# Altium PCB IOT.PcbDoc
Units mm, origin at the board's own origin, x right, y up, seen from the top; angles counter-clockwise.
Board outline 91.82 x 95.63 mm, 2 copper layers (Top Layer, Bottom Layer); 63 components, 48 nets, 238 pads, 49 vias.
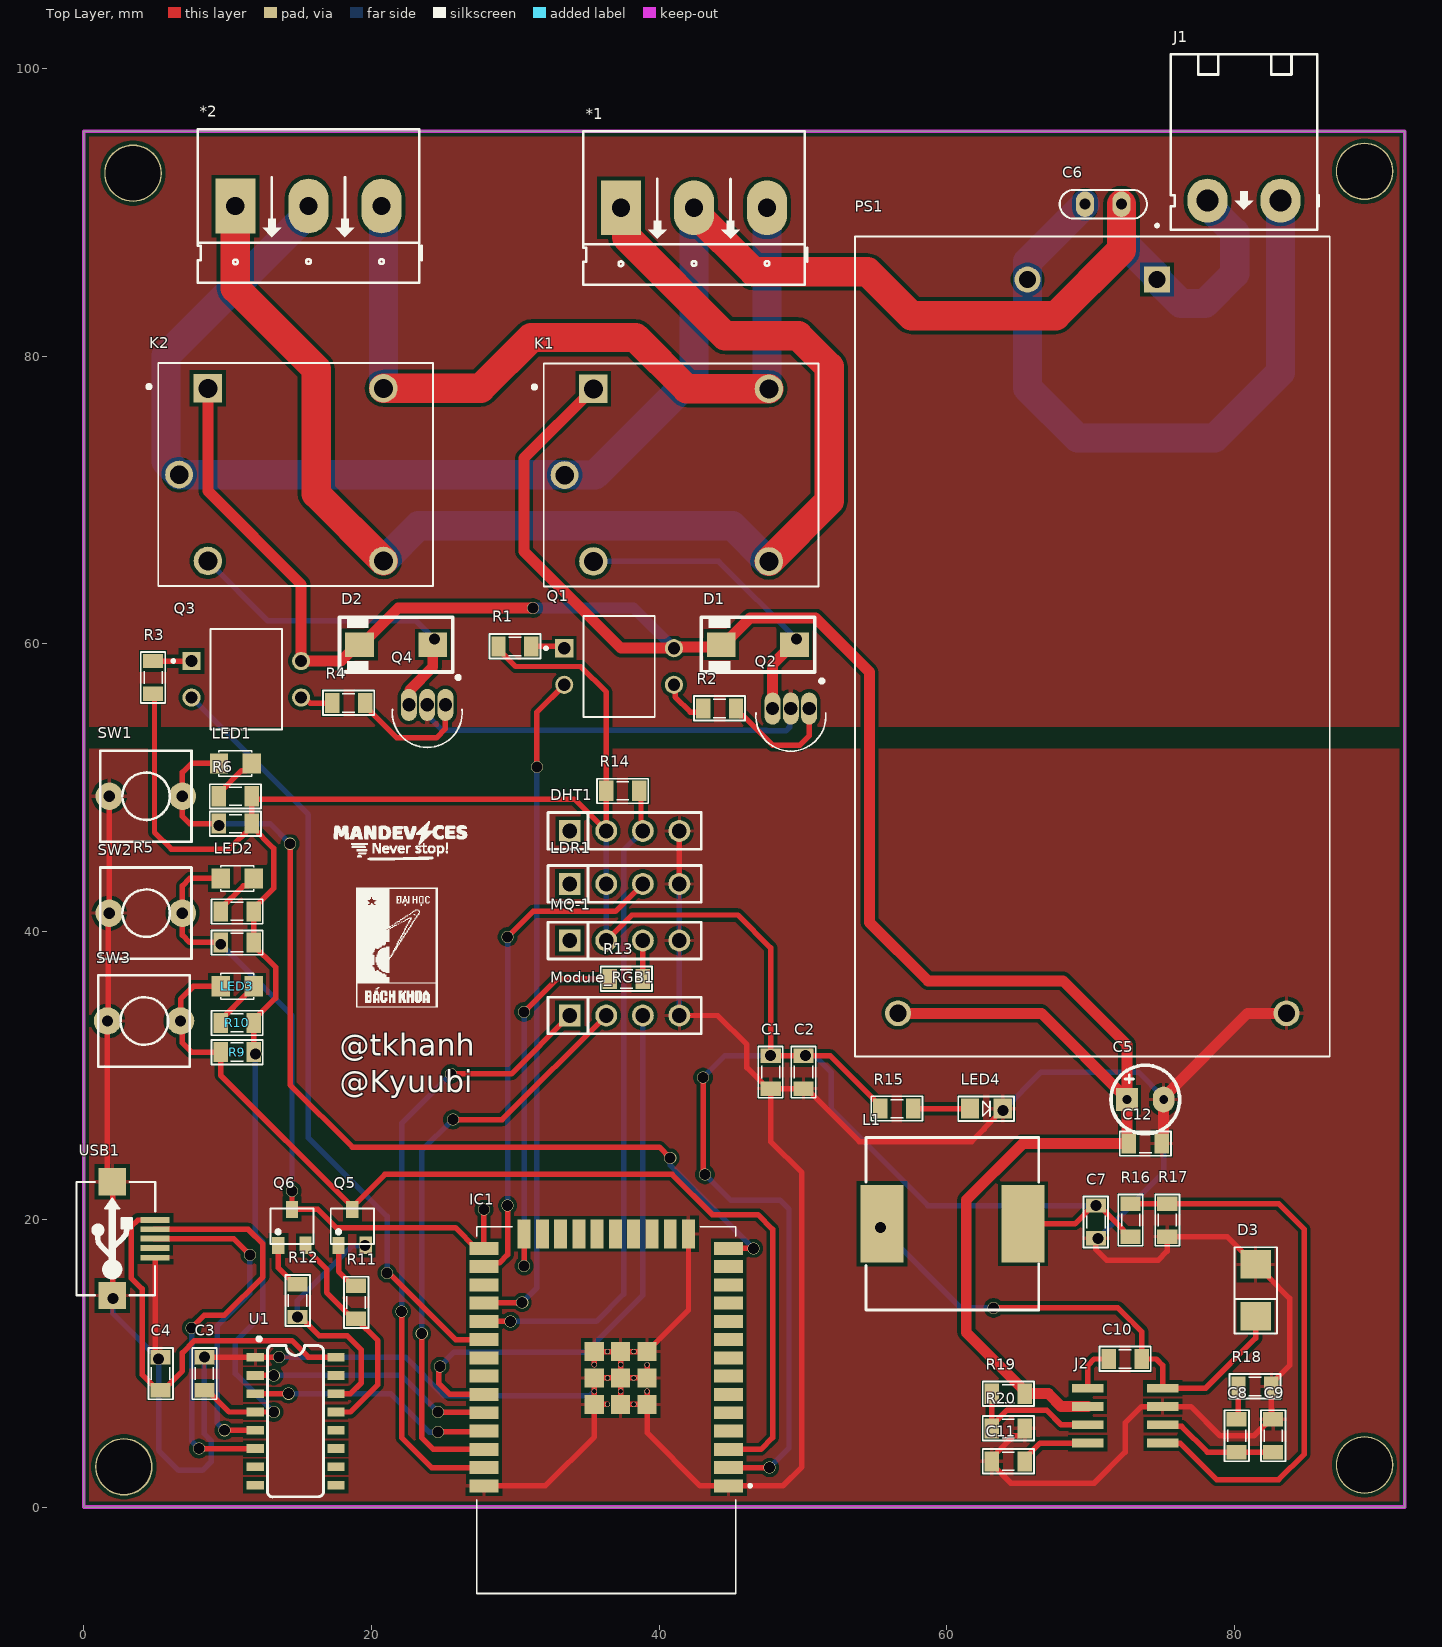
[diagram p0: Top Layer view]
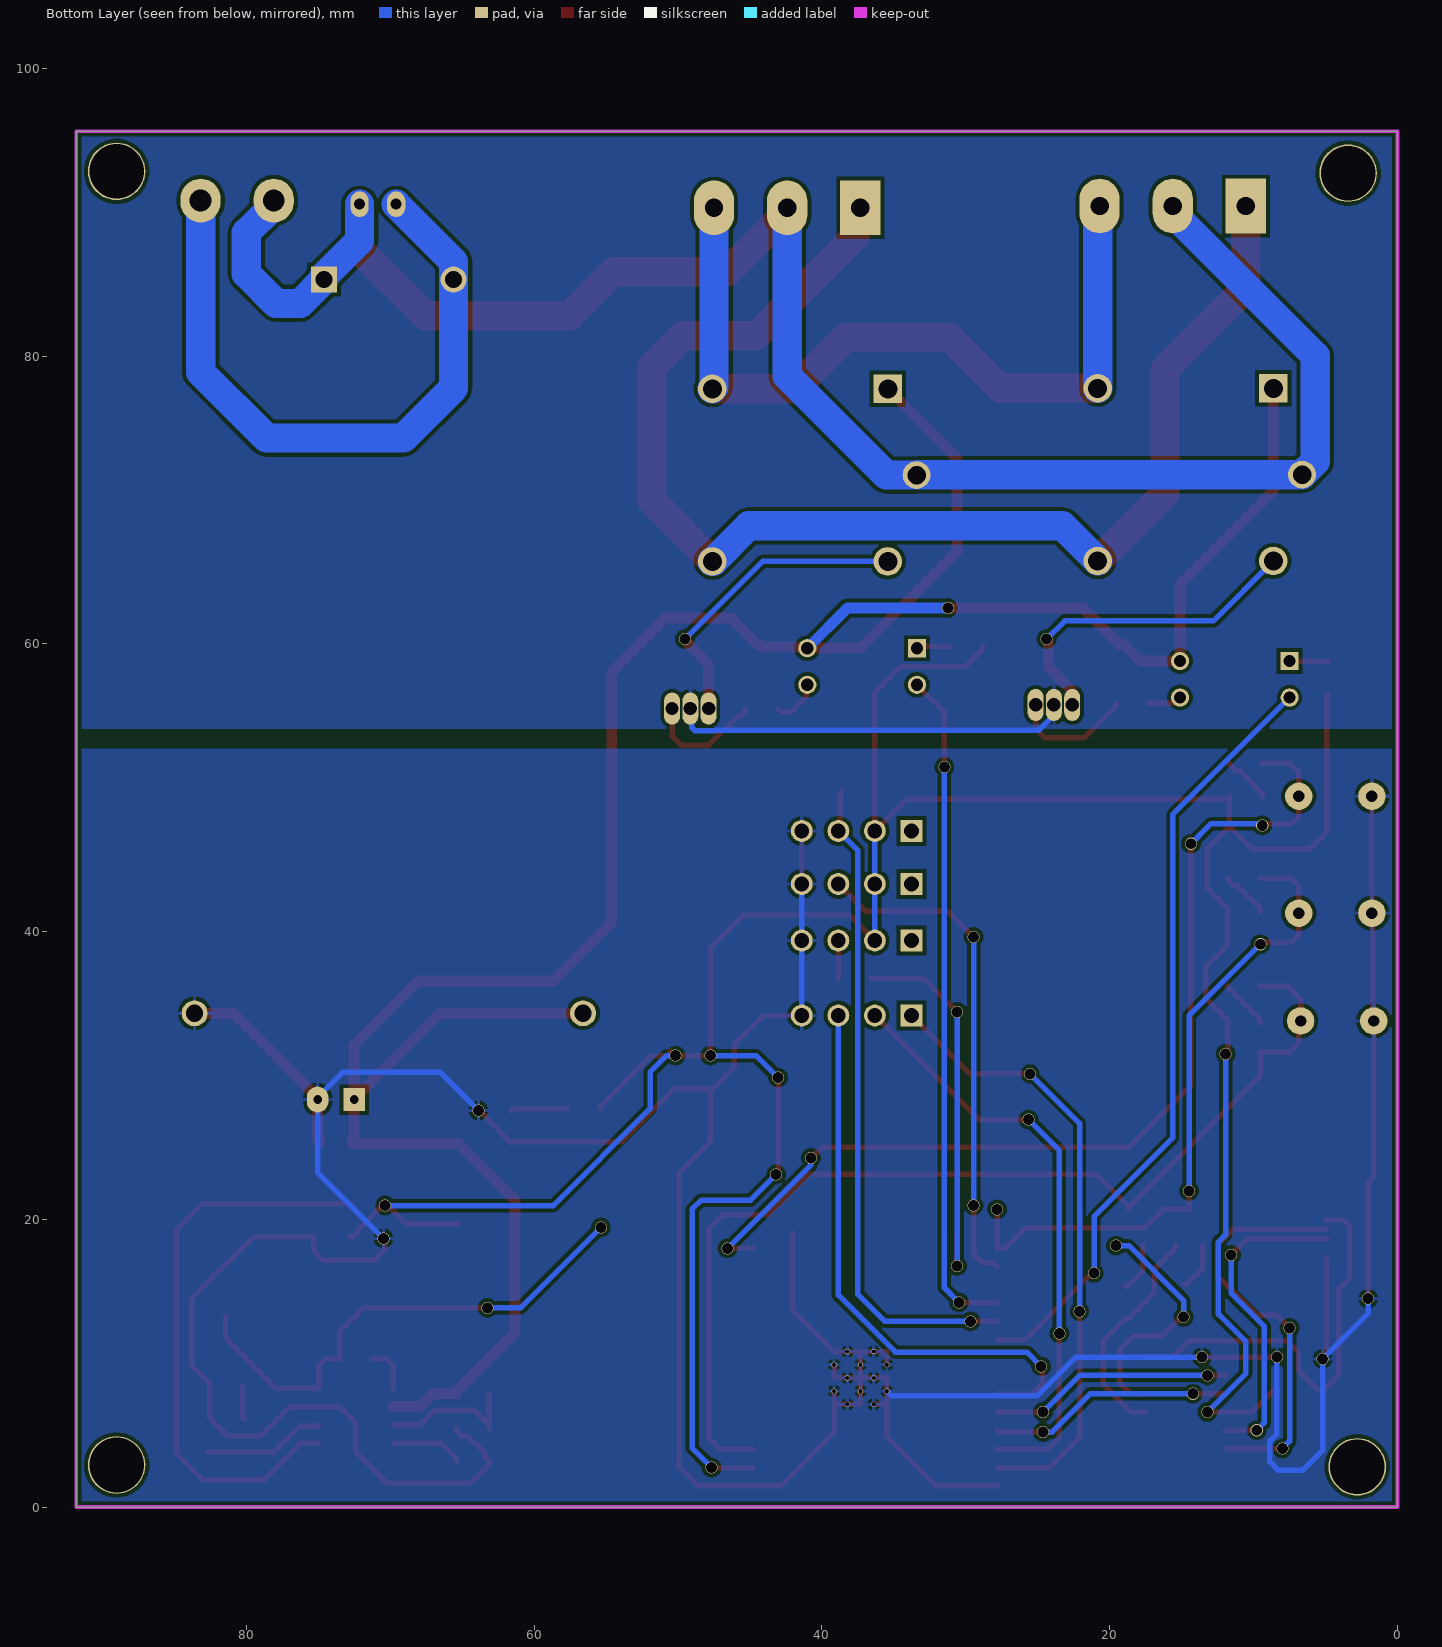
[diagram p1: Bottom Layer view, seen from below]

## Layer stack, top to bottom
Top Solder: solder mask 0.0102, Solder Resist, Dk 3.5
Top Layer: signal copper 0.0356
Dielectric 1: dielectric 0.32, FR-4, Dk 4.8
Bottom Layer: signal copper 0.0356
Bottom Solder: solder mask 0.0102, Solder Resist, Dk 3.5

## Board outline
0,0 0,95.631 91.821,95.631 91.821,0

## Design rules (kind name [scope] priority, off if disabled: settings)
Clearance [All] p1: gap=0.254 ignorepadtopadclearanceinfootprint=TRUE
DiffPairsRouting [All] p1: maxlimit=0.254 minlimit=0.254 mostfreqgap=0.254 toplayer_minwidth=0.381 toplayer_maxwidth=0.381 toplayer_prefwidth=0.381 bottomlayer_minwidth=0.381 bottomlayer_maxwidth=0.381 bottomlayer_prefwidth=0.381 maxuncoupledlength=12.7
PolygonConnect [All] p1: connectstyle=Relief reliefconductorwidth=0.254 reliefentries=4 polygonreliefangle="90 Angle" airgapwidth=0.254
RoutingVias [All] p1: holewidth=2.032 width=2.108 viastyle="Through Hole" minholewidth=0.381 minwidth=0.457 maxholewidth=0.762 maxwidth=0.838
SolderMaskExpansion [All] p1: expansion=0.102 istentingtop=FALSE
Width [All] p1: maxlimit=2.032 minlimit=0.381 preferedwidth=0.762 minimp=50.000000 maximp=50.000000 favimp=50.000000
29 further rules are at their usual default settings.

## Classes and differential pairs
differential pair class diff: D0
component class 4.SENSOR: DHT1 LDR1 Module_RGB1 MQ-1 R13 R14
component class 3.MCU: C1 C2 C3 C4 IC1 LED1 LED2 LED3 Q5 Q6 R5 R6 R10 R11 R12 SW1 SW2 SW3 U1 USB1
component class 2.RELAY: *1 *2 D1 D2 K1 K2 Q1 Q2 Q3 Q4 R1 R2 R3 R4
component class 1.POWER: C5 C6 C7 C8 C9 C10 C11 C12 D3 J1 J2 L1 LED4 PS1 R15 R16 R17 R18 R19 R20
differential pair D0: +D0_P -D0_N

## Components (designator, comment, footprint, x,y, rotation, side; value= is the part's Value field where it differs from the comment)
*1 "BIG_Header 3" KF-128_3P 37.338,90.297 r0 top
*2 "BIG_Header 3" KF-128_3P 10.541,90.424 r0 top
C1 "10uF" CAP_0805 47.752,30.226 r270 top value=33p
C2 "10uF" CAP_0805 50.038,30.226 r270 top value=33p
C3 "10nF" CAP_0805 8.382,9.271 r90 top value=33p
C4 "100nF" CAP_0805 5.334,9.271 r90 top value=33p
C5 "220uF" C3MM 73.787,28.321 r0 top
C6 "Varistor" CAP_CERAMIC 72.136,90.551 r180 top value=33p
C7 "22uF" CAP_0805 70.358,19.812 r270 top value=33p
C8 "680pF" CAP_0805 80.137,4.953 r90 top value=33p
C9 "47pF" CAP_0805 82.677,4.953 r90 top value=33p
C10 "0.1uF" CAP_0805 72.39,10.287 r180 top value=33p
C11 "15nF" CAP_0805 64.262,3.175 r180 top value=33p
C12 "10uF" CAP_0805 73.787,25.273 r0 top value=33p
D1 "1N5822" SMA 46.863,59.944 r180 top value="Diode c?m 1N5408"
D2 "1N5822" SMA 21.717,59.944 r180 top value="Diode c?m 1N5408"
D3 "1N4007" DIO-214AC(SMA) 81.407,14.986 r90 top
DHT1 "JP4" JP4-C1T 33.782,46.99 r0 top
IC1 "ESP32-WROOM-32" MODULE_ESP32-WROOM-32 36.322,6.731 r180 top
J1 "AC_In" KF2-5.08T 83.185,90.805 r180 top
J2 "TPS54232" SOIC8 72.39,6.35 r270 top
K1 "SRD-05VDC-SL-C" RELAY_SRD-05VDC-SL-C 41.525,71.724 r0 top
K2 "SRD-05VDC-SL-C" RELAY_SRD-05VDC-SL-C 14.732,71.755 r0 top
L1 "6.8uH" L-SMD-M-12x10 60.378,19.685 r90 top value="150 mH"
LDR1 "LDR" JP4-C1T 33.782,43.307 r0 top
LED1 "LED" LED-0805-Blue 11.684,51.689 r180 top value="LED 3 ly Single Colour"
LED2 "LED" LED-0805-Blue 11.811,43.688 r180 top value="LED 3 ly Single Colour"
LED3 "LED" LED-0805-Blue 11.811,36.195 r180 top value="LED 3 ly Single Colour"
LED4 "LED" LED_RED_SMD_0805 62.738,27.686 r0 top value="LED 3 ly Single Colour"
Module_RGB1 "JP4" JP4-C1T 33.782,34.163 r0 top
MQ-1 "JP4" JP4-C1T 33.782,39.37 r0 top
PS1 "HLK-20M12" CONV_HLK-20M12 70.104,59.817 r270 top
Q1 "PC817-B" DIP762W50P254L650H455Q4B 37.211,58.42 r0 top
Q2 "BC547" TO-92 49.022,54.991 r180 top value=C1815
Q3 "PC817-B" DIP762W50P254L650H455Q4B 11.303,57.531 r0 top
Q4 "BC547" TO-92 23.749,55.245 r180 top value=C1815
Q5 "C1815" SOT23D 18.669,19.431 r0 top
Q6 "C1815" SOT23D 14.478,19.431 r0 top
R1 "1K" RES-SMD-0805 29.972,59.817 r180 top
R2 "1K" RES-SMD-0805 44.196,55.499 r180 top
R3 "1K" RES-SMD-0805 4.826,57.658 r270 top
R4 "1K" RES-SMD-0805 18.415,55.88 r180 top
R5 "10k" RES-SMD-0805 10.541,47.498 r0 top
R6 "330" RES-SMD-0805 10.541,49.403 r0 top
R7 "10k" RES-SMD-0805 10.668,39.243 r0 top
R8 "330" RES-SMD-0805 10.668,41.402 r0 top
R9 "10k" RES-SMD-0805 10.668,31.623 r0 top
R10 "330" RES-SMD-0805 10.668,33.655 r0 top
R11 "10k" RES-SMD-0805 18.923,14.224 r90 top
R12 "10k" RES-SMD-0805 14.859,14.351 r90 top
R13 "1k" RES-SMD-0805 37.719,36.703 r180 top
R14 "10k" RES-SMD-0805 37.465,49.784 r0 top
R15 "330" RES-SMD-0805 56.515,27.686 r180 top
R16 "4.7K" RES-SMD-0805 72.771,19.939 r270 top
R17 "1.5K" RES-SMD-0805 75.311,19.939 r90 top
R18 "17.4K" RES-SMD-0805 81.407,8.382 r180 top
R19 "150K" RES-SMD-0805 64.262,7.874 r0 top
R20 "48.7K" RES-SMD-0805 64.262,5.461 r180 top
SW1 "SW" SW2 6.858,49.403 r180 top value="SW chip 2 pin"
SW2 "SW" SW2 6.858,41.275 r180 top value="SW chip 2 pin"
SW3 "SW" SW2 6.731,33.782 r180 top value="SW chip 2 pin"
U1 "CH340C" SOP-16 14.732,5.969 r270 top
USB1 "USB" USB-M1 4.953,18.654 r90 top

## Footprints (in the part's own frame and the unit in brackets; to place one, negate y for a bottom-side part, rotate by r counter-clockwise, add the part's x,y. Pads: shape width x height; smd on the part's side, far side on the other; paste and mask are expansions set on the pad)
C3MM [mm]
  rect 1.5x1.58 hole 0.6: 1(-1.27,0)
  oval 1.5x1.8 hole 0.6: 2(1.27,0)
  silkscreen extent -2.39,-2.39 2.39,2.39, body extent -1.99,-2.03 2.01,1.97, height 7.01
CAP_0805 [mil]
  rect 39.37x55 smd: 1(-45,0) 2(45,0)
  silkscreen extent -70,-34 70,33, body extent -40,-25 40,25, height 24
CAP_CERAMIC [mil] "Tu gom mini"
  oval 50x70 hole 30: 1(0,0) 2(100,0)
  silkscreen extent -69,-39 169,39, body extent -65,-33 165,33, height 241
CONV_HLK-20M12 [mm]
  rect 1.8x1.8 hole 1.2: 1(-25.5,4.5)
  round 1.8 hole 1.2: 2(-25.5,-4.5) 3(25.5,13.5) 4(25.5,-13.5)
  silkscreen extent -29.35,-16.5 28.5,16.5, body extent -28.5,-16.5 28.5,16.5, height 22.5
DIO-214AC(SMA) [mm] "DO-214AC Diode Smallest Size"
  rect 2x2.1 smd: 1(1.88,-0.051) 2(-1.732,-0.051)
  silkscreen extent -2.92,-1.52 3.07,1.42, body extent -2.5,-1.35 2.7,1.25, height 2.4
DIP762W50P254L650H455Q4B [mm]
  rect 1.26x1.26 hole 0.84: 1(-3.81,1.27)
  round 1.26 hole 0.84: 2(-3.81,-1.27) 3(3.81,-1.27) 4(3.81,1.27)
  silkscreen extent -5.18,-3.5 2.48,3.5
JP4-C1T [mm] "4 row, straight, gold plating"
  rect 1.52x1.52 hole 1.02: 1(0,0)
  round 1.52 hole 1.02: 2(2.54,0) 3(5.08,0) 4(7.62,0)
  silkscreen extent -1.52,-1.27 9.14,1.27, body extent -1.52,-1.25 9.14,1.25, height 8.51
KF2-5.08T [mil] "Header 2, 2 pin, hight 300mil, Pin to Pin 200, Colour Green"
  oval 110x120 hole 60: 1(0,0) 2(200,0)
  silkscreen extent -105,-400 300,80, body extent -97,-399 297,73, height 334
KF-128_3P [mm]
  rect 2.794x3.8 hole 1.27: 1(0,0)
  oval 2.794x3.8 hole 1.27: 2(5.08,0) 3(10.16,0)
  silkscreen extent -2.62,-5.33 12.95,5.33, body extent -2.56,-5.25 13.28,5.28, height 14.3
L-SMD-M-12x10 [mm] "WE-PDA SMD Shielded Power Inductor, 1210"
  rect 5.4x3 smd: 1(0,4.9) 2(0,-4.9)
  silkscreen extent -6,-6 6,6, body extent -6,-6 6,6, height 9.7
LED-0805-Blue [mil]
  rect 50x55 smd: 1(0,0) 2(90,0)
  silkscreen extent 0,-35 90,35, body extent 5,-25 85,25, height 43
LED_RED_SMD_0805 [mil]
  rect 50x55 smd: 1(-45,0) 2(45,0)
  silkscreen extent -77,-34 76,33, body extent -41,-27 41,27, height 35
MODULE_ESP32-WROOM-32 [mm]
  rect 2x0.9 smd: 1(-8.5,5.26) 2(-8.5,3.99) 3(-8.5,2.72) 4(-8.5,1.45) 5(-8.5,0.18) 6(-8.5,-1.09) 7(-8.5,-2.36) 8(-8.5,-3.63) 9(-8.5,-4.9) 10(-8.5,-6.17) 11(-8.5,-7.44) 12(-8.5,-8.71) 13(-8.5,-9.98) 14(-8.5,-11.25) 25(8.5,-11.25) 26(8.5,-9.98) 27(8.5,-8.71) 28(8.5,-7.44) 29(8.5,-6.17) 30(8.5,-4.9) 31(8.5,-3.63) 32(8.5,-2.36) 33(8.5,-1.09) 34(8.5,0.18) 35(8.5,1.45) 36(8.5,2.72) 37(8.5,3.99) 38(8.5,5.26)
  rect 0.9x2 smd: 15(-5.715,-12.25) 16(-4.445,-12.25) 17(-3.175,-12.25) 18(-1.905,-12.25) 19(-0.635,-12.25) 20(0.635,-12.25) 21(1.905,-12.25) 22(3.175,-12.25) 23(4.445,-12.25) 24(5.715,-12.25)
  rect 1.33x1.33 smd: 39_1(-2.835,-0.405) 39_2(-1,-0.405) 39_3(0.835,-0.405) 39_4(-2.835,-2.24) 39_5(-1,-2.24) 39_6(0.835,-2.24) 39_7(-2.835,-4.075) 39_8(-1,-4.075) 39_9(0.835,-4.075)
  round 0.35 hole 0.3: 39_10(-1.917,-0.405) 39_11(-0.082,-0.405) 39_12(-2.835,-1.322) 39_13(-1,-1.322) 39_14(0.835,-1.322) 39_15(-1.917,-2.24) 39_16(-0.082,-2.24) 39_17(-2.835,-3.157) 39_18(-1,-3.157) 39_19(0.835,-3.157) 39_20(-1.917,-4.075) 39_21(-0.082,-4.075)
  silkscreen extent -10.1,-12.75 9,12.75, body extent -9.02,-12.75 8.98,12.75, height 3.2
RELAY_SRD-05VDC-SL-C [mm]
  rect 1.98x1.98 / inner round 1.98 / far side rect 1.98x1.98 hole 1.32: A1(-6.1,6)
  round 1.98 hole 1.32: A2(-6.1,-6) NC(6.1,6) NO(6.1,-6)
  round 1.935 hole 1.29: COM(-8.1,0)
  silkscreen extent -10.3,-7.75 9.55,7.75, body extent -9.6,-7.8 9.6,7.8, height 15.8
RES-SMD-0805 [mil]
  rect 39.37x55 smd: 1(-45,0) 2(45,0)
  silkscreen extent -70,-34 70,33, body extent -39,-25 39,25, height 31
SMA [mm]
  rect 2x1.7 smd: 1(-2.544,0) 2(2.544,0)
  silkscreen extent -3.94,-1.9 3.94,1.91, body extent -2.87,-1.4 2.87,1.4, height 2.29
SOIC8 [mm]
  rect 0.6x2.2 smd: 1(-1.905,-2.6) 2(-0.635,-2.6) 3(0.635,-2.6) 4(1.905,-2.6) 5(1.905,2.6) 6(0.635,2.6) 7(-0.635,2.6) 8(-1.905,2.6)
SOP-16 [mm]
  rect 0.6x1.2 smd: 1(-4.445,-2.8) 2(-3.175,-2.8) 3(-1.905,-2.8) 4(-0.635,-2.8) 5(0.635,-2.8) 6(1.905,-2.8) 7(3.175,-2.8) 8(4.445,-2.8) 9(4.445,2.8) 10(3.175,2.8) 11(1.905,2.8) 12(0.635,2.8) 13(-0.635,2.8) 14(-1.905,2.8) 15(-3.175,2.8) 16(-4.445,2.8)
  silkscreen extent -5.84,-2.67 5.26,1.95, body extent -4.95,-3.47 4.95,3.47, height 1.75
SOT23D [mm] "SOT 23C - 1-3-2 - BCE"
  rect 0.85x1.2 smd: 1(-0.95,-1.25) 2(0.94,-1.245) 3(0,1.25)
  silkscreen extent -1.5,-1.14 1.5,1.32, body extent -1.5,-1.17 1.5,1.33, height 1.06
SW2 [mil] "SW button 2pin, 250x 250 mil"
  round 75 hole 31: 1(0,0) 2(200,0)
  silkscreen extent -25,-125 225,125
TO-92 [mm]
  oval 1.11x2.22 hole 0.93: 1(-1.397,-0.506) 2(-0.127,-0.506) 3(1.143,-0.506)
  silkscreen extent -2.56,-2.54 2.3,2.45, body extent -2.41,-0.89 2.16,2.73, height 20.45
USB-M1 [mm]
  rect 0.4x2 smd: 1(1.3,0) 2(0.65,0) 3(0,0) 4(-0.65,0) 5(-1.321,0)
  rect 1.9x1.9 smd: 5(-3.95,2.968) 5(3.95,2.968)
  silkscreen extent -3.94,-0.03 3.94,5.46, body extent -3.98,0.11 4,5.54, height 2.71

## Part data
C1 C2 C3 C4 C7 C8 C9 C10 C11 C12: library part CapSMD, "Capacitor", LatestRevisionDate=17-Jul-2002, LatestRevisionNote="Re-released for DXP Platform.", PackageReference=RAD-0.3, Published=8-Jun-2000, Publisher="Altium Limited"
C5: library part "Cap Pol", "Polarized Capacitor (Axial)", LatestRevisionDate=17-Jul-2002, LatestRevisionNote="Re-released for DXP Platform.", PackageReference=POLAR0.8, Published=8-Jun-2000, Publisher="Altium Limited"
C6: library part CapCeramic, "Capacitor", LatestRevisionDate=17-Jul-2002, LatestRevisionNote="Re-released for DXP Platform.", PackageReference=RAD-0.3, Published=8-Jun-2000, Publisher="Altium Limited"
D1 D2: "Schottky Rectifiers"
D3: library part D1A, "Diode 1A"
DHT1 Module_RGB1 MQ-1: "WR-PHD 2.54 mm Angled Socket Header", Manufacturer="W¨¹rth Elektronik eiSos GmbH", partNo=613004143121, ComponentLink1 Description=Manufacturer, ComponentLink1URL=http://www.we-online.com, ComponentLink2 Description=Datasheet, ComponentLink2URL=http://katalog.we-online.de/em/datasheet/6130xx143121.pdf, Created by="Karrer Zheng", Created Date="29 March 2013", NoPins=04
IC1: "Bluetooth, WiFi Transceiver Module 2.4GHz ~ 2.5GHz Surface Mount", Package="Module Espressif Systems", Digi-Key_Part_Number=1904-1010-1-ND, Digi-Key_Purchase_URL=https://www.digikey.com/product-detail/en/espressif-systems/ESP32-WROOM-32/1904-1010-1-ND/8544305?utm_source=snapeda&utm_medium=aggregator&utm_campaign=symbol, MF="Espressif Systems", MP=ESP32-WROOM-32, SnapEDA_Link=https://www.snapeda.com/parts/ESP32-WROOM-32/Espressif%20Systems/view-part/2753322/?ref=snap
J1: library part KF2, Manufacturer="Würth Elektronik eiSos GmbH", partNo=691103110002, ComponentLink1 Description=Manufacturer, ComponentLink1URL=http://www.we-online.com, ComponentLink2 Description=Datasheet, ComponentLink2URL=http://katalog.we-online.de/em/datasheet/6911031100xx.pdf, Created by="Karrer Zheng", Created Date="29 October 2013", NoPins=2
J2: "Buck Switching Regulator IC Positive Adjustable 0.8V 1 Output 2A 8-SOIC (0.154, 3.90mm Width)", Package="- Texas Instruments", Check_prices=https://www.snapeda.com/parts/TPS54232/Texas+Instruments/view-part/?ref=eda, MF="Texas Instruments", MP=TPS54232, SnapEDA_Link=https://www.snapeda.com/parts/TPS54232/Texas+Instruments/view-part/?ref=snap
K1 K2: "https://linhkien.cxt.vn/3210-sra-12vdc-cl-songle-relay-20a-12vdc-5-chan.html", Package="NON STANDARD-5 Songle Relay", Availability="Not in stock", Check_prices=https://www.snapeda.com/parts/SRD-05VDC-SL-C/Songle+Relay/view-part/?ref=eda, MF="Songle Relay", MP=SRD-05VDC-SL-C, Price=None, SnapEDA_Link=https://www.snapeda.com/parts/SRD-05VDC-SL-C/Songle+Relay/view-part/?ref=snap
L1: library part Inductor, "Inductor"
LDR1: library part JP4, "WR-PHD 2.54 mm Angled Socket Header", Manufacturer="W¨¹rth Elektronik eiSos GmbH", partNo=613004143121, ComponentLink1 Description=Manufacturer, ComponentLink1URL=http://www.we-online.com, ComponentLink2 Description=Datasheet, ComponentLink2URL=http://katalog.we-online.de/em/datasheet/6130xx143121.pdf, Created by="Karrer Zheng", Created Date="29 March 2013", NoPins=04
LED1 LED2 LED3 LED4: "LED Single colour Green and Red"
PS1: "20W ultra-small series module power supply", Package="Non-Standard Hi-link", Availability="Not in stock", Check_prices=https://www.snapeda.com/parts/HLK-20M12/Hi-link/view-part/?ref=eda, MF=Hi-link, MP=HLK-20M12, Price=None, SnapEDA_Link=https://www.snapeda.com/parts/HLK-20M12/Hi-link/view-part/?ref=snap
Q1 Q3: "Phototransistors 4-DIP _0.300, 7.62mm_", Package="DIP-4 American Bright", Availability=Unavailable, MF="American Bright", MP=PC817-B, Price=None, SnapEDA_Link=https://www.snapeda.com/parts/PC817-B/American%20Bright/view-part/524587/?ref=snap
Q2 Q4: library part C1815, "NPN 600mW, ECB"
Q5 Q6: library part 2SC1815, "NPN 600mW, ECB"
R1 R2 R3 R4 R6 R8 R10 R15 R16 R17 R18 R19 R20: library part "Resistor - SMD", "Resistor SMD", Manufacturer="Generic Components", Class=Passive, Published=08/06/2000, Publisher="Altium Hobart Technology Centre"
R5 R7 R9 R11 R12: library part "Resistor - SMD", "Resistor", Manufacturer="Generic Components", Class=Passive, Published=08/06/2000, Publisher="Altium Hobart Technology Centre"
R13: library part "Resistor - SMD", Manufacturer="Generic Components", Class=Passive, Published=08/06/2000, Publisher="Altium Hobart Technology Centre"
R14: library part "Resistor - SMD", "1k", Manufacturer="Generic Components", Class=Passive, Published=08/06/2000, Publisher="Altium Hobart Technology Centre"
SW1 SW2 SW3: library part SW2, "Switch button 2 pin"
U1: "USB to serial chip CH340", Package=Package, Availability=Unavailable, Check_prices=https://www.snapeda.com/parts/CH340C/WCH/view-part/5428851/?ref=eda, MF=WCH, MP=CH340C, Price=None, SnapEDA_Link=https://www.snapeda.com/parts/CH340C/WCH/view-part/5428851/?ref=snap
USB1: library part USB-M

## Free pads (board coordinates)
  round 4 hole 3.8: 2(2.794,2.794) 2(3.429,92.71) 2(89.027,2.921) 2(89.027,92.837)

## Via types
v1: diameter 0.838, hole 0.762, Top Layer to Bottom Layer, 49 vias

## Nets (pads, with @x,y where several pads share a name; then routed paths per layer and width w, separated by ;. In a path a pad name is that pad's centre, name@x,y a point inside that pad or via, vN(x,y) a via of type N, cw(c..) or ccw(c..) an arc to the next point about the centre after c; other vN are vias at no path point)
3V3: C1.1 C2.1 C3.1 C7.1 DHT1.2 IC1.2 L1.2 LDR1.2 MQ-1.2 R1.2 R3.2 R5.2 R6.2 R7.2 R8.2 R9.2 R10.2 R14.1 R15.2 R16.2 U1.4 | length 227.5
  Top Layer w0.381: R3.2 4.92,56.421 4.92,46.896 6.096,45.72 10.104,45.72 R5.2@11.684,47.3 ; C3.1 8.58,8.128 10.104,6.604 U1.4 v1(13.208,6.604) ; R6.2 R6.2@11.684,49.205 ; R9.2 R10.2 11.811,33.853 13.335,35.378 13.335,37.52 11.811,39.045 R7.2 R8.2 11.811,41.6 13.208,42.998 13.208,45.775 R5.2@11.684,47.3 ; R1.2 28.829,59.619 30.028,58.42 34.544,58.42 36.322,56.642 R14.1 DHT1.2 34.107,49.205 R6.2@11.684,49.205 ; MQ-1.2 38.1,41.148 45.466,41.148 47.752,38.862 v1(47.752,31.369) v1(50.165,31.369) C2.1@50.236,31.369 ; v1@43.053,23.241 v1(43.053,29.845) ; IC1.2 v1(47.678,2.741) ; C2.1@50.546,31.679 C2.1@50.236,31.369 ; R15.2 55.372,27.884 51.887,31.369 C2.1@50.236,31.369 ; L1.2 68.889,19.685 70.16,20.955 v1(70.358,20.955) 70.556,20.955 72.263,19.249 72.263,19.106 72.573,18.796 R16.2 ; R5.2@11.684,47.3 R5.2 R6.2@11.684,49.205
  Bottom Layer w0.381: v1(11.938,31.496) 11.938,18.923 12.446,18.415 12.446,13.399 10.541,11.494 10.541,9.271 v1(13.208,6.604) ; MQ-1.2 LDR1.2 DHT1.2 ; v1(43.053,29.845) 44.577,31.369 v1(47.752,31.369) ; v1(43.18,23.114) 44.958,21.336 48.387,21.336 49.022,20.701 49.022,4.085 v1(47.678,2.741) ; v1(50.165,31.369) 50.8,31.369 51.943,30.226 51.943,27.686 58.674,20.955 v1(70.358,20.955)
5V: C4.1 U1.16 USB1.1 | length 29
  Top Layer w0.381: USB1.1 4.948,19.948 3.769,19.948 3.302,19.482 3.302,15.916 4.064,15.154 4.064,9.199 5.136,8.128 C4.1 5.532,8.128 6.858,9.453 6.858,10.717 7.698,11.557 14.478,11.557 15.621,10.414 U1.16
12V: C5.1 C12.1 D1.2 D2.2 J2.2 K1.A1 K2.A1 PS1.4 Q1.4 Q3.4 R19.2 | length 189.7
  Top Layer w0.762: K2.A1 8.632,70.616 15.113,64.135 Q3.4 17.88,58.801 19.023,59.944 D2.2 19.323,59.944 21.863,62.484 v1(31.242,62.484) ; K1.A1 30.607,72.906 30.607,66.421 37.338,59.69 Q1.4 41.116,59.785 44.16,59.785 D1.2 44.469,59.944 46.312,61.787 50.862,61.787 54.61,58.039 54.61,40.64 58.674,36.576 68.072,36.576 72.517,32.131 C5.1@72.517,28.361 ; PS1.4 66.561,34.317 C5.1@72.517,28.361 ; J2.2 67.937,6.985 67.048,7.874 R19.2 65.405,8.072 61.341,12.136 61.341,21.336 65.278,25.273 C12.1 72.644,25.471 72.517,25.598 C5.1 C5.1@72.517,28.361
  Bottom Layer w0.762: v1(31.242,62.484) 38.227,62.484 Q1.4
AC2: C6.2 J1.1 PS1.2 | length 47.3
  Bottom Layer w2.032: C6.2 65.604,86.559 PS1.2 65.604,77.779 69.088,74.295 78.613,74.295 83.185,78.867 J1.1
COM1: *1.2 *2.2 C6.1 J1.2 K1.COM K2.COM PS1.1 | length 130.6
  Top Layer w2.032: *1.2 42.418,90 46.566,85.852 54.483,85.852 57.531,82.804 67.564,82.804 72.136,87.376 C6.1
  Bottom Layer w2.032: *2.2 15.621,89.921 5.715,80.015 5.715,72.672 K2.COM 33.394,71.755 K1.COM 35.529,71.724 42.418,78.613 *1.2 ; C6.1 72.136,88.011 74.604,85.543 PS1.1 76.261,83.66 77.945,83.66 80.01,85.725 80.01,88.567 78.105,90.472 J1.2
D0_N: U1.5 USB1.3 | length 22.6
  Top Layer w0.381: USB1.3 9.062,18.654 9.064,18.656 10.427,18.656 v1(11.557,17.526) ; v1(9.779,5.334) U1.5
  Bottom Layer w0.381: v1(9.779,5.334) 9.271,5.842 9.271,12.573 11.557,14.859 v1(11.557,17.526)
D0_P: U1.6 USB1.2 | length 29.2
  Top Layer w0.381: USB1.2 9.062,19.304 9.064,19.306 11.431,19.306 12.446,18.291 12.446,16.002 9.779,13.335 8.382,13.335 v1(7.493,12.446) ; v1(8.001,4.064) U1.6
  Bottom Layer w0.381: v1(7.493,12.446) 7.493,4.572 v1(8.001,4.064)
DTR: Q6.2 R11.1 U1.13 | length 15.6
  Top Layer w0.381: Q6.2 15.418,18.011 16.891,16.538 16.891,14.915 18.725,13.081 R11.1 20.447,11.557 20.447,8.509 18.542,6.604 U1.13
EN: IC1.3 LED3.2 Q5.3 R9.1 SW3.1 | length 73.5
  Top Layer w0.381: LED3.2 7.62,36.195 6.731,35.306 SW3.1 6.858,33.655 6.858,32.258 7.493,31.623 R9.1 9.525,30 Q5.3@18.669,20.856 ; Q5.3 Q5.3@18.669,20.856 ; IC1.3 47.064,4.011 47.879,4.826 47.879,19.304 46.863,20.32 43.688,20.32 40.894,23.114 20.927,23.114 Q5.3@18.669,20.856
GND: C1.2 C2.2 C3.2 C4.2 C5.2 C7.2 C9.2 C11.2 C12.2 D3.1 DHT1.4 IC1.1 IC1.15 IC1.38 IC1.39_1 IC1.39_2 IC1.39_3 IC1.39_4 IC1.39_5 IC1.39_6 IC1.39_7 IC1.39_8 IC1.39_9 IC1.39_10 IC1.39_11 IC1.39_12 IC1.39_13 IC1.39_14 IC1.39_15 IC1.39_16 IC1.39_17 IC1.39_18 IC1.39_19 IC1.39_20 IC1.39_21 J2.7 LDR1.4 LED4.2 Module_RGB1.4 MQ-1.4 PS1.3 R17.1 R18.1 R20.1 SW1.2 SW2.2 SW3.2 U1.1 USB1.5 | length 309.9
  Top Layer w0.381: SW1.2 SW2.2 1.714,41.212 1.714,33.846 SW3.2 1.651,22.938 1.985,22.604 2.032,22.557 v1(2.032,14.478) ; USB1.5@4.953,17.333 4.962,17.324 4.962,10.532 v1(5.207,10.287) ; v1(8.382,10.414) U1.1 v1(13.589,10.414) ; IC1.38 32.078,1.471 35.487,4.88 IC1.39_3 ; IC1.39_19 IC1.39_9 IC1.39_21 IC1.39_8 ; IC1.39_11 IC1.39_3 ; IC1.39_12 IC1.39_1 ; IC1.39_17 IC1.39_4 IC1.39_15 IC1.39_5 ; Module_RGB1.4 44.069,34.163 46.101,32.131 46.101,30.536 C1.2@47.554,29.083 ; LDR1.4 DHT1.4 ; IC1.15 42.037,13.686 IC1.39_7 IC1.39_20 IC1.39_8 ; v1(63.881,27.559) 63.817,27.559 62.579,26.321 62.579,26.257 61.722,25.4 53.919,25.4 50.236,29.083 C2.2 C1.2 47.752,25.4 49.911,23.241 49.911,2.794 48.588,1.471 IC1.1 42.852,1.471 39.157,5.166 IC1.39_1 ; R20.1 65.405,5.275 65.096,4.966 64.656,4.966 63.429,3.739 63.429,3.485 C11.2 63.119,2.977 64.445,1.651 70.231,1.651 72.39,3.81 72.39,5.842 73.533,6.985 76.962,6.985 78.994,4.953 81.336,4.953 C9.2@82.478,6.096 ; C7.2 70.358,17.907 71.12,17.145 74.676,17.145 75.311,17.78 R17.1 79.477,18.796 81.408,16.866 D3.1 81.508,16.866 82.317,16.056 82.317,16.006 83.82,14.503 83.82,9.85 82.55,8.58 R18.1 C9.2@82.55,6.223 ; IC1.39_3 IC1.39_14 IC1.39_6 IC1.39_16 IC1.39_5 ; IC1.39_5 IC1.39_18 IC1.39_8 ; IC1.39_5 IC1.39_13 IC1.39_2 IC1.39_10 IC1.39_1
  Top Layer w0.762: C12.2 74.93,25.471 75.057,25.599 C5.2 75.057,28.471 80.903,34.317 PS1.3
  Bottom Layer w0.381: v1(2.032,14.478) 2.032,13.462 v1(5.207,10.287) 5.207,3.937 6.604,2.54 8.255,2.54 8.865,3.15 8.865,4.597 8.382,5.08 v1(8.382,10.414) ; v1(13.589,10.414) 22.352,10.414 25.019,7.747 35.181,7.747 IC1.39_14 ; Module_RGB1.4 MQ-1.4 LDR1.4 ; v1(63.881,27.559) 66.548,30.226 73.302,30.226 75.057,28.471 C5.2 75.057,23.241 v1(70.485,18.669) v1@70.358,18.669
GND-AC: Q2.2 Q4.2 | length 27.8
  Bottom Layer w0.381: Q4.2 23.876,55.053 24.954,53.975 47.433,53.975 47.465,53.943 48.807,53.943 49.062,54.198 49.062,55.41 Q2.2
IO2: IC1.24 R13.2 | length 26.8
  Top Layer w0.381: v1(30.607,16.764) IC1.24 ; v1(30.607,34.417) 32.893,36.703 R13.2
  Bottom Layer w0.381: v1(30.607,16.764) v1(30.607,34.417)
IO4: IC1.26 LDR1.3 | length 35
  Top Layer w0.381: IC1.26 28.082,16.971 28.89,16.971 29.464,17.544 v1(29.464,20.955) ; v1(29.464,39.624) 31.242,41.402 36.957,41.402 LDR1.3
  Bottom Layer w0.381: v1(29.464,20.955) v1(29.464,39.624)
IO5: DHT1.3 IC1.29 R14.2 | length 46.1
  Top Layer w0.381: IC1.29 v1(29.665,12.901) ; R14.2 38.735,49.657 38.735,47.117 DHT1.3
  Bottom Layer w0.381: v1(29.665,12.901) 35.634,12.901 37.527,14.794 37.527,45.655 DHT1.3
IO12: IC1.14 LED1.2 R5.1 SW1.1 | length 69.9
  Top Layer w0.381: R5.1 7.366,47.498 6.858,48.006 6.858,51.054 7.493,51.689 LED1.2 ; v1(14.351,46.101) 14.351,29.337 18.669,25.019 40.005,25.019 v1(40.767,24.257) ; IC1.14 v1(46.556,17.981)
  Bottom Layer w0.381: v1(9.398,47.371) 9.525,47.498 12.954,47.498 v1(14.351,46.101) ; v1(40.767,24.257) 40.767,23.77 v1(46.556,17.981)
IO21: IC1.33 Module_RGB1.3 | length 40.3
  Top Layer w0.381: v1(24.765,9.779) 24.682,9.696 24.682,8.592 25.453,7.821 IC1.33
  Bottom Layer w0.381: v1(24.765,9.779) 25.753,10.767 34.897,10.767 38.862,14.732 Module_RGB1.3
IO22: IC1.36 Module_RGB1.2 | length 41.3
  Top Layer w0.381: v1(23.495,12.065) 23.495,4.826 24.31,4.011 IC1.36 ; v1(25.654,26.924) 29.083,26.924 Module_RGB1.2
  Bottom Layer w0.381: v1(23.495,12.065) 23.495,24.765 v1(25.654,26.924)
IO23: IC1.37 Module_RGB1.1 | length 43.2
  Top Layer w0.381: v1(22.098,13.589) 22.098,4.826 24.183,2.741 IC1.37 ; v1(25.527,30.099) 29.718,30.099 Module_RGB1.1
  Bottom Layer w0.381: v1(22.098,13.589) 22.098,26.67 v1(25.527,30.099)
IO_0: IC1.25 LED2.2 Q6.3 R7.1 SW2.1 | length 46.8
  Top Layer w0.381: R7.1 7.366,39.243 6.858,39.751 SW2.1 6.858,43.18 7.366,43.688 LED2.2 ; v1(14.478,21.971) Q6.3 16.276,20.681 17.536,19.421 25.832,19.421 27.272,17.981 IC1.25 v1(27.822,20.692)
  Bottom Layer w0.381: v1(9.525,39.116) 14.478,34.163 v1(14.478,21.971)
IO_17: IC1.28 Q1.2 | length 46.8
  Top Layer w0.381: IC1.28 27.848,14.198 30.454,14.198 v1(30.48,14.224) ; v1(31.496,51.435) 31.496,55.245 Q1.2
  Bottom Layer w0.381: v1(30.48,14.224) 31.496,15.24 v1(31.496,51.435)
IO_18: IC1.30 Q3.2 | length 54.3
  Top Layer w0.381: v1(21.082,16.256) 21.23,16.256 25.855,11.631 IC1.30
  Bottom Layer w0.381: Q3.2 15.621,48.133 15.621,25.654 21.082,20.193 v1(21.082,16.256)
NC1: *1.3 *2.3 K1.NC K2.NC | length 54.9
  Top Layer w2.032: K2.NC 27.59,77.755 31.115,81.28 38.354,81.28 41.91,77.724 K1.NC
  Bottom Layer w2.032: K2.NC *2.3@20.832,90.293 ; *1.3 47.498,77.851 K1.NC
NetC8_1: C8.1 C9.1 J2.6 | length 8.5
  Top Layer w0.381: J2.6 75.099,5.606 76.309,5.606 78.105,3.81 C8.1 C9.1
NetC8_2: C8.2 R18.2 | length 2.3
  Top Layer w0.381: C8.2 80.264,6.223 R18.2
NetC10_1: C10.1 D3.2 J2.8 L1.1 | length 35.7
  Top Layer w0.381: v1(63.246,13.843) 71.882,13.843 73.533,12.192 C10.1 74.549,10.287 74.99,9.846 J2.8 77.978,8.255 81.458,11.735 D3.2
  Bottom Layer w0.381: v1(55.372,19.431) 60.96,13.843 v1(63.246,13.843)
NetC10_2: C10.2 J2.1 | length 3.2
  Top Layer w0.381: J2.1 69.79,9.846 70.231,10.287 C10.2
NetC11_1: C11.1 J2.4 | length 5
  Top Layer w0.381: C11.1 65.405,3.373 66.477,4.445 J2.4
NetD1_1: D1.1 K1.A2 Q2.3 | length 21.4
  Top Layer w0.762: Q2.3 47.879,58.566 D1.1@49.257,59.944
  Bottom Layer w0.381: K1.A2 44.131,65.724 v1(49.53,60.325)
NetD2_1: D2.1 K2.A2 Q4.3 | length 22.9
  Top Layer w0.762: Q4.3 22.673,55.818 22.673,56.786 24.261,58.374 D2.1
  Bottom Layer w0.381: K2.A2 12.792,61.595 23.114,61.595 v1(24.384,60.325)
NetJ2_3: J2.3 R19.1 R20.2 | length 10.1
  Top Layer w0.381: R19.1 R20.2 63.119,5.659 64.191,6.731 66.929,6.731 67.945,5.715 J2.3
NetLED1_1: LED1.1 R6.1 | length 3.4
  Top Layer w0.381: R6.1 9.398,49.601 10.977,51.181 11.239,51.181 11.684,51.625 LED1.1
NetLED2_1: LED2.1 R8.1 | length 3.4
  Top Layer w0.381: R8.1 9.525,41.6 11.104,43.18 11.367,43.18 11.811,43.624 LED2.1
NetLED3_1: LED3.1 R10.1 | length 3.5
  Top Layer w0.381: R10.1 9.525,33.853 11.358,35.687 11.367,35.687 11.811,36.131 LED3.1
NetLED4_1: LED4.1 R15.1 | length 4
  Top Layer w0.381: R15.1 61.468,27.686 LED4.1@61.595,27.559
NetMQ-1_3: MQ-1.3 R13.1 | length 2.7
  Top Layer w0.381: R13.1 MQ-1.3
NetQ1_1: Q1.1 R1.1 | length 2.3
  Top Layer w0.381: R1.1 33.274,59.817 Q1.1
NetQ1_3: Q1.3 R2.2 | length 3.4
  Top Layer w0.381: Q1.3 41.109,57.062 41.109,56.3 42.164,55.245 42.799,55.245 R2.2
NetQ2_1: Q2.1 R2.1 | length 8.4
  Top Layer w0.381: R2.1 45.339,55.301 45.649,54.991 45.847,54.991 47.879,52.959 49.784,52.959 50.419,53.594 Q2.1
NetQ3_1: Q3.1 R3.1 | length 2.7
  Top Layer w0.381: R3.1 Q3.1
NetQ3_3: Q3.3 R4.2 | length 2.3
  Top Layer w0.381: Q3.3 15.351,56.261 15.732,55.88 R4.2
NetQ4_1: Q4.1 R4.1 | length 8.6
  Top Layer w0.381: R4.1 19.558,55.682 21.773,53.467 24.511,53.467 25.146,54.102 Q4.1
NetQ5_1: Q5.1 R11.2 | length 3.4
  Top Layer w0.381: Q5.1 17.719,16.373 18.725,15.367 R11.2
NetQ6_1: Q6.1 R12.2 | length 3.4
  Top Layer w0.381: Q6.1 13.528,16.626 14.661,15.494 R12.2
NO1: *1.1 *2.1 K1.NO K2.NO | length 93
  Top Layer w2.032: *2.1 10.541,84.709 16.159,79.091 16.159,70.428 K2.NO ; *1.1 37.719,89.916 37.719,88.265 44.577,81.407 49.657,81.407 51.816,79.248 51.816,69.915 K1.NO
  Bottom Layer w2.032: K2.NO 23.276,68.199 45.085,68.199 47.56,65.724 K1.NO
RST: Q5.2 R12.1 U1.14 | length 17.2
  Top Layer w0.381: v1(14.859,13.208) 15.057,13.208 16.355,11.91 18.316,11.91 19.304,10.922 19.304,8.636 18.542,7.874 U1.14
  Bottom Layer w0.381: v1(14.859,13.208) 14.859,14.351 18.669,18.161 v1(19.558,18.161)
RX: IC1.35 U1.3 | length 17
  Top Layer w0.381: U1.3 v1(14.224,7.874) ; v1(24.638,5.207) 24.675,5.244 27.785,5.244 IC1.35
  Bottom Layer w0.381: v1(14.224,7.874) 21.336,7.874 24.003,5.207 v1(24.638,5.207)
TX: IC1.34 U1.2 | length 17
  Top Layer w0.381: U1.2 v1(13.208,9.144) ; v1(24.638,6.604) 24.664,6.578 27.795,6.578 IC1.34
  Bottom Layer w0.381: v1(13.208,9.144) 22.098,9.144 v1(24.638,6.604)
VSENSE: J2.5 R16.1 R17.2 | length 40.1
  Top Layer w0.381: R16.1 R17.2 83.058,21.082 84.836,19.304 84.836,3.683 83.058,1.905 78.74,1.905 76.2,4.445 J2.5
pads on no net: DHT1.1 IC1.4 IC1.5 IC1.6 IC1.7 IC1.8 IC1.9 IC1.10 IC1.11 IC1.12 IC1.13 IC1.16 IC1.17 IC1.18 IC1.19 IC1.20 IC1.21 IC1.22 IC1.23 IC1.27 IC1.31 IC1.32 LDR1.1 MQ-1.1 U1.7 U1.8 U1.9 U1.10 U1.11 U1.12 U1.15 USB1.4

## Polygon pours and split planes (outlines as drawn)
GND on Top Layer "Kyuubi" (solid, remove dead copper, pour order 2): 0,52.705 91.821,52.705 91.821,0 0,0
GND-AC on Top Layer "Kyuubi" (solid, remove dead copper, pour order 0): -0.127,95.631 91.821,95.631 91.821,53.975 91.567,54.229 0,54.229 -0.127,54.356
GND on Bottom Layer "Kyuubi" (solid, remove dead copper, pour order 3): -0.127,52.705 91.821,52.705 91.694,52.578 91.694,0 0.127,0 -0.127,0.254
GND-AC on Bottom Layer "Kyuubi" (solid, remove dead copper, pour order 1): 91.694,95.631 91.694,54.356 91.44,54.102 0,54.102 0,95.504 -0.127,95.631 0,95.758 91.821,95.758

## Keep-outs
Keep-Out Layer:
  the board outline again, w0.254

## Silkscreen, mask and mechanical layers (free items; w line width, h text height)
Top Overlay:
  drawing of 1603 lines, arcs and shapes, not listed
  text "@tkhanh" at 17.78,31.369 h1.52
  text "@Kyuubi" at 17.78,28.829 h1.52

## Text inside footprints (layer, text, board x,y; h text height)
IC1: Mechanical 13 "ANTENNA" at 42.322,-2.269 h0.75 r180